# Altium PCB UCC28180_Power Board.PcbDoc
Units mil, origin at the board's own origin, x right, y up, seen from the top; angles counter-clockwise.
Board outline 5400.53 x 3184.68 mil, 4 copper layers (Top Layer, Signal Layer 1, Signal Layer 2, Bottom Layer), stack 33.434 mil thick; 75 components, 35 nets, 171 pads, 16 vias.
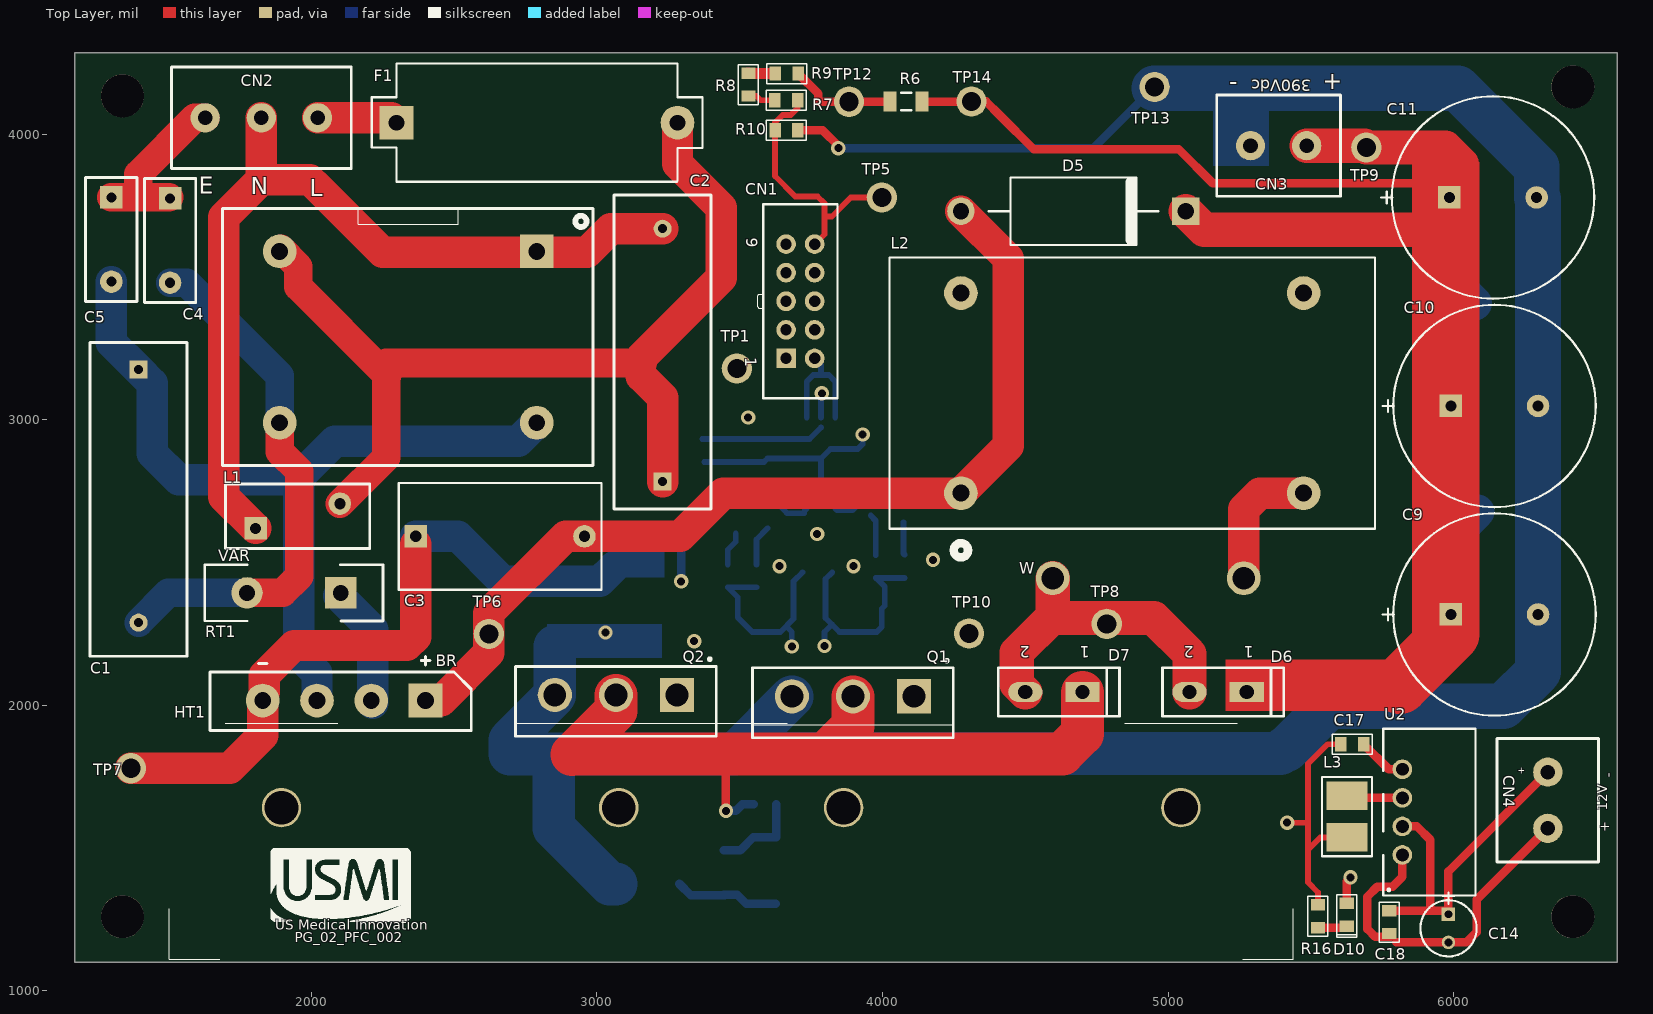
[diagram p0: Top Layer view]
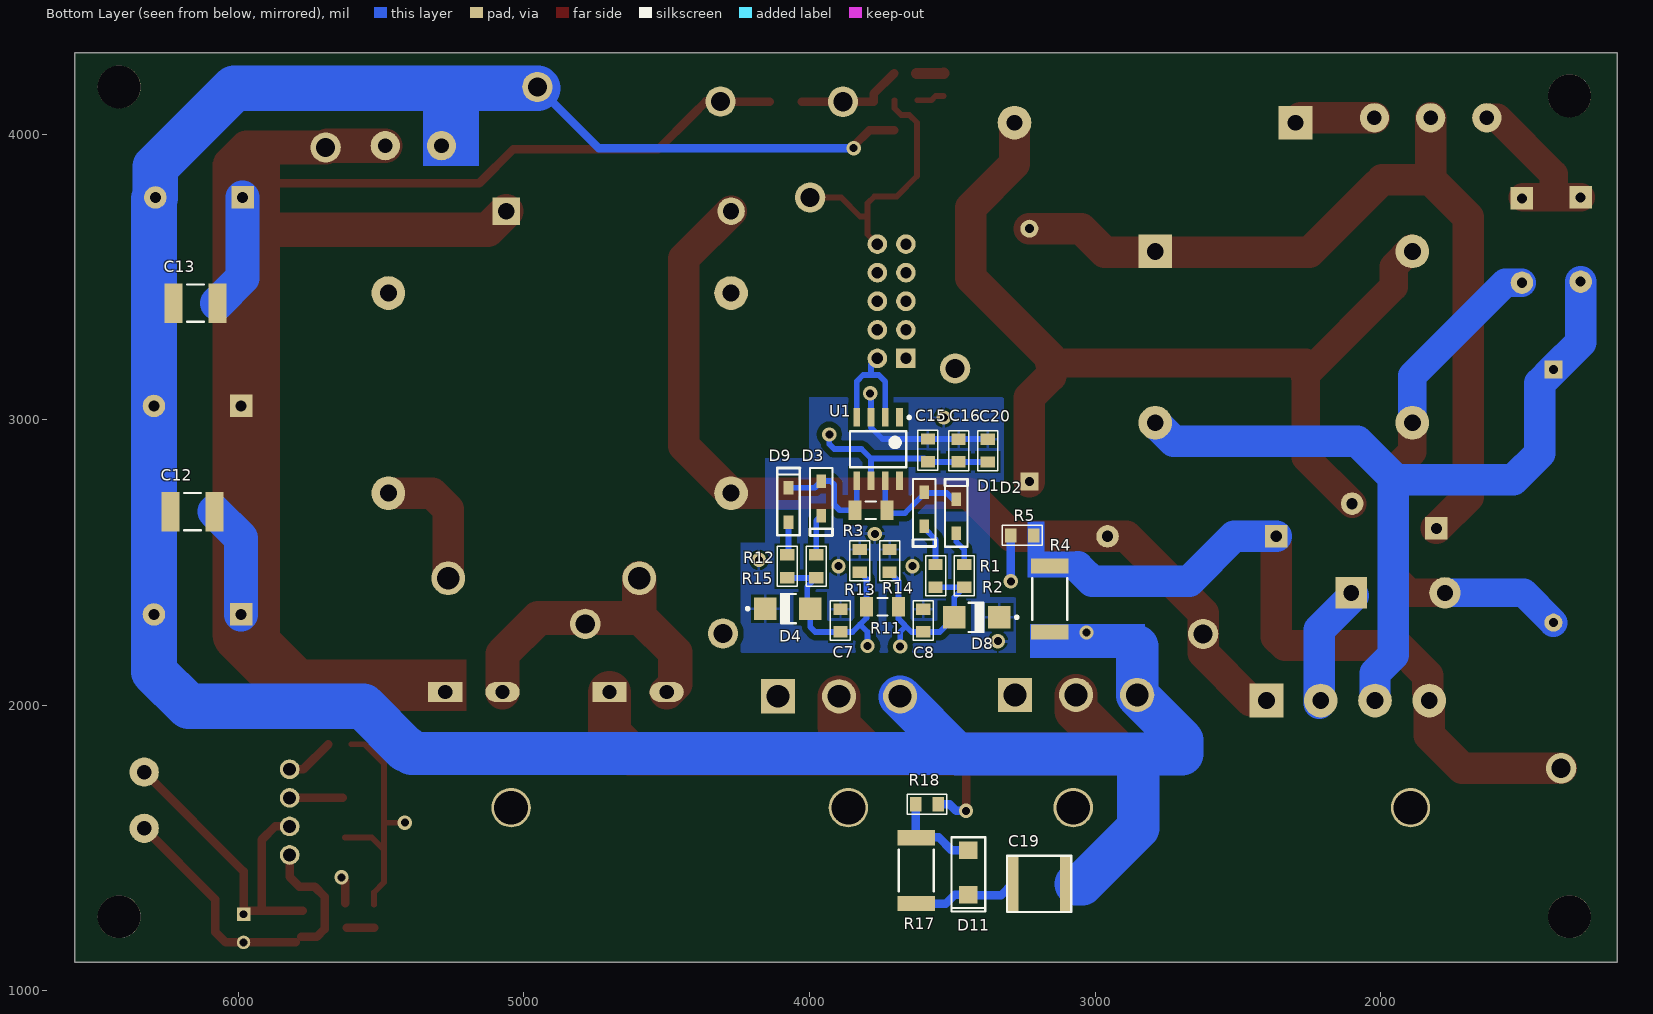
[diagram p1: Bottom Layer view, seen from below]
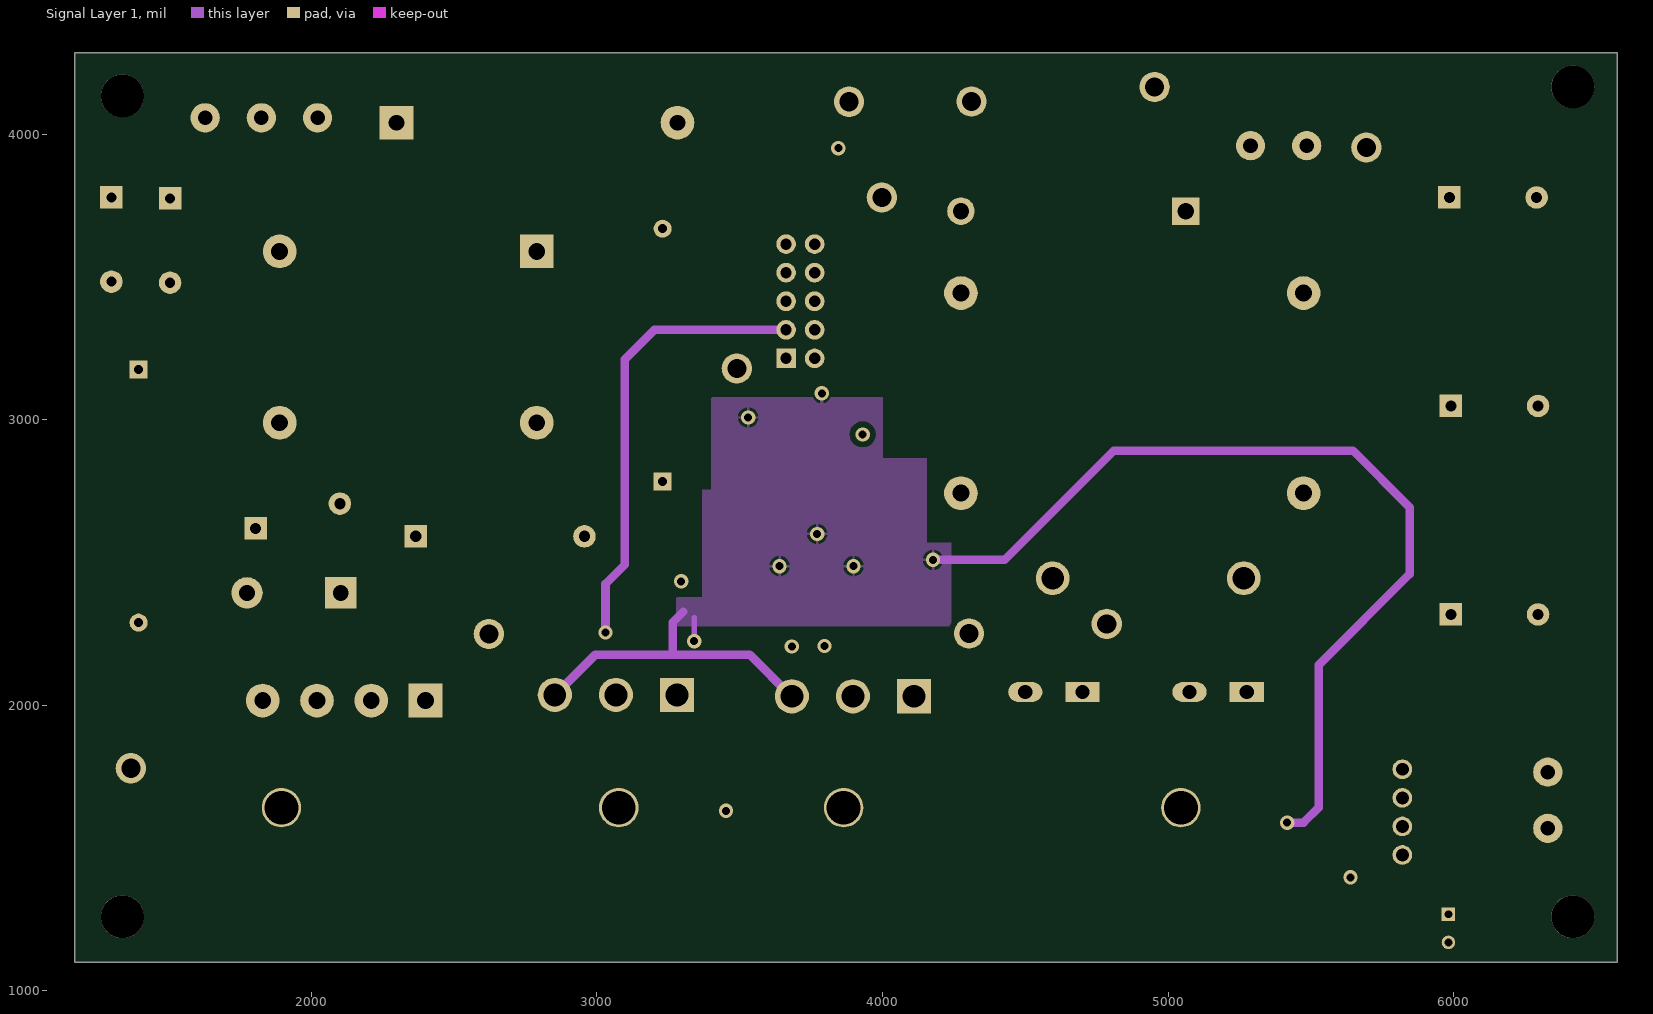
[diagram p2: Signal Layer 1]
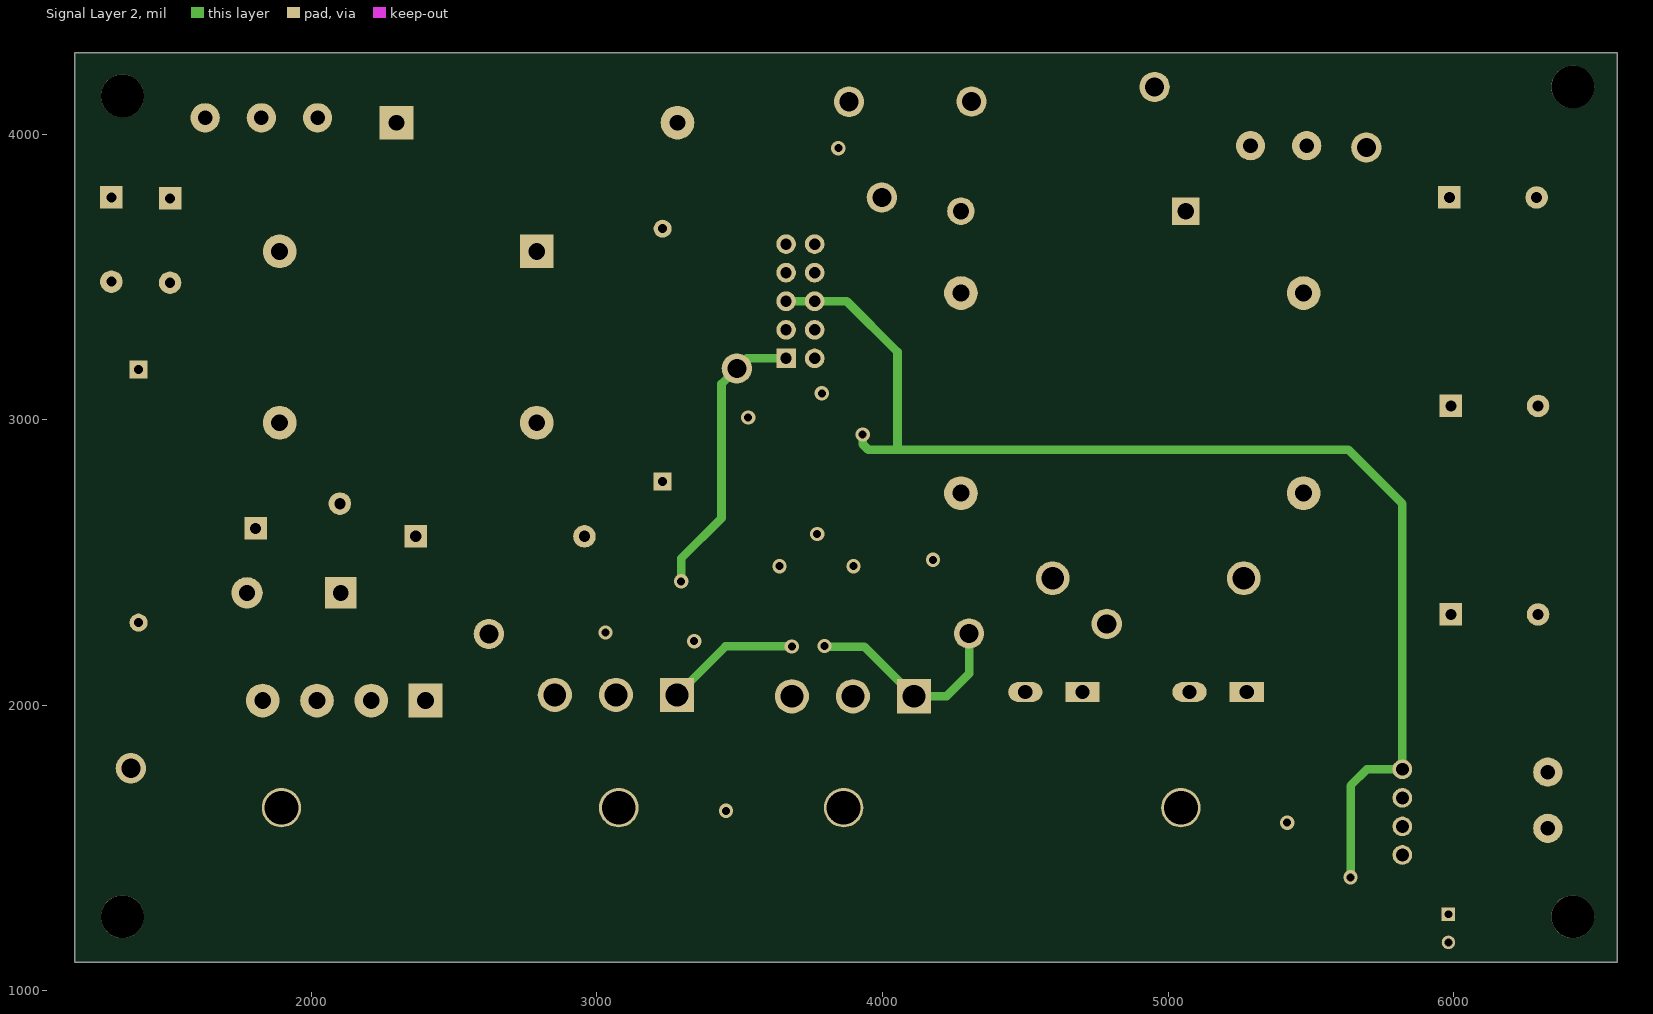
[diagram p3: Signal Layer 2]

## Layer stack, top to bottom
Top Solder: solder mask 0.4, Solder Resist, Dk 3.5
Top Layer: signal copper 2.8
Dielectric 1: core 10, FR-4, Dk 4.2
Signal Layer 1: signal copper 1.417
Dielectric 3: prepreg 5, Dk 4.2
Signal Layer 2: signal copper 1.417
Dielectric 2: core 10, Dk 4.2
Bottom Layer: signal copper 2.8
Bottom Solder: solder mask 0.4, Solder Resist, Dk 3.5

## Board outline
1171.84,1100 1171.84,4284.68 6572.37,4284.68 6572.37,1100

## Design rules (kind name [scope] priority, off if disabled: settings)
Clearance Clearance_12 [InNamedPolygon('Bottom layer-GND')] p1: gap=10 ignorepadtopadclearanceinfootprint=FALSE except(0: Arc-Hole Track-Hole SMDPad-Hole THPad-Hole Via-Hole Fill-Hole Poly-Hole Region-Hole Text-Hole; 20: Arc-Poly Track-Poly SMDPad-Poly THPad-Poly Via-Poly Fill-Poly Poly-Poly)
Clearance Clearance_11 [InNamedPolygon('Bottom layer-GND-sub')] p2: gap=10 ignorepadtopadclearanceinfootprint=FALSE except(0: Arc-Hole Track-Hole SMDPad-Hole THPad-Hole Via-Hole Fill-Hole Poly-Hole Region-Hole Text-Hole; 20: Arc-Poly Track-Poly SMDPad-Poly THPad-Poly Via-Poly Fill-Poly Poly-Poly)
Clearance Clearance_10 [InNamedPolygon('Bottom layer-GND-sub')] p3: gap=10 ignorepadtopadclearanceinfootprint=FALSE except(0: Arc-Hole Track-Hole SMDPad-Hole THPad-Hole Via-Hole Fill-Hole Poly-Hole Region-Hole Text-Hole; 20: Arc-Poly Track-Poly SMDPad-Poly THPad-Poly Via-Poly Fill-Poly Poly-Poly)
Clearance Clearance_9 [InNamedPolygon('Bottom layer-GND-main')] p4: gap=10 ignorepadtopadclearanceinfootprint=FALSE except(0: Arc-Hole Track-Hole SMDPad-Hole THPad-Hole Via-Hole Fill-Hole Poly-Hole Region-Hole Text-Hole; 55: Arc-Poly Track-Poly SMDPad-Poly THPad-Poly Via-Poly Fill-Poly Poly-Poly)
Clearance Clearance_8 [InNamedPolygon('Bottom layer-GND-main')] p5: gap=10 ignorepadtopadclearanceinfootprint=FALSE except(0: Arc-Hole Track-Hole SMDPad-Hole THPad-Hole Via-Hole Fill-Hole Poly-Hole Region-Hole Text-Hole; 55: Arc-Poly Track-Poly SMDPad-Poly THPad-Poly Via-Poly Fill-Poly Poly-Poly)
Clearance Clearance_7 [InNamedPolygon('Bottom layer-GND-main')] p6: gap=10 ignorepadtopadclearanceinfootprint=FALSE except(0: Arc-Hole Track-Hole SMDPad-Hole THPad-Hole Via-Hole Fill-Hole Poly-Hole Region-Hole Text-Hole)
Clearance Clearance_6 [InNamedPolygon('Bottom layer-GND-sub')] p7: gap=10 ignorepadtopadclearanceinfootprint=FALSE except(0: Arc-Hole Track-Hole SMDPad-Hole THPad-Hole Via-Hole Fill-Hole Poly-Hole Region-Hole Text-Hole; 20: Arc-Poly Track-Poly SMDPad-Poly THPad-Poly Via-Poly Fill-Poly Poly-Poly)
Clearance Clearance_5 [InNamedPolygon('Bottom layer-GND-main')] p8: gap=10 ignorepadtopadclearanceinfootprint=FALSE except(0: Arc-Hole Track-Hole SMDPad-Hole THPad-Hole Via-Hole Fill-Hole Poly-Hole Region-Hole Text-Hole; 55: Arc-Poly Track-Poly SMDPad-Poly THPad-Poly Via-Poly Fill-Poly Poly-Poly)
Clearance Clearance_4 [InNamedPolygon('Bottom layer-GND-main')] p9: gap=10 ignorepadtopadclearanceinfootprint=FALSE except(0: Arc-Hole Track-Hole SMDPad-Hole THPad-Hole Via-Hole Fill-Hole Poly-Hole Region-Hole Text-Hole; 20: Arc-Poly Track-Poly SMDPad-Poly THPad-Poly Via-Poly Fill-Poly Poly-Poly)
Clearance Clearance_3 [InNamedPolygon('GND_L02_P011')] p10: gap=20 ignorepadtopadclearanceinfootprint=FALSE except(0: Arc-Hole Track-Hole SMDPad-Hole THPad-Hole Via-Hole Fill-Hole Poly-Hole Region-Hole Text-Hole)
Clearance Clearance_2 [InNamedPolygon('Bottom layer-GND3')] p11: gap=20 ignorepadtopadclearanceinfootprint=FALSE except(0: Arc-Hole Track-Hole SMDPad-Hole THPad-Hole Via-Hole Fill-Hole Poly-Hole Region-Hole Text-Hole)
Clearance [InNamedPolygon('Bottom layer-GND3')] p12: gap=10 ignorepadtopadclearanceinfootprint=FALSE except(0: Arc-Hole Track-Hole SMDPad-Hole THPad-Hole Via-Hole Fill-Hole Poly-Hole Region-Hole Text-Hole)
Clearance Clearance_1 [All] p13: gap=10 ignorepadtopadclearanceinfootprint=FALSE except(0: Arc-Hole Track-Hole SMDPad-Hole THPad-Hole Via-Hole Fill-Hole Poly-Hole Region-Hole Text-Hole; 55: Arc-Poly Track-Poly SMDPad-Poly THPad-Poly Via-Poly Fill-Poly Poly-Poly)
Clearance "Clearance 2" [All] p14: gap=10 ignorepadtopadclearanceinfootprint=FALSE except(0: Arc-Hole Track-Hole SMDPad-Hole THPad-Hole Via-Hole Fill-Hole Poly-Hole Region-Hole Text-Hole; 20: Arc-Poly Track-Poly SMDPad-Poly THPad-Poly Via-Poly Fill-Poly Poly-Poly)
ComponentClearance [All] p1 off: gap=10 collisioncheckmode=3 verticalgap=10 showdistances=FALSE
PolygonConnect PolygonConnect_1 [All vs IsNamedPolygon('Bottom layer-GND-main')] p1: connectstyle=Relief reliefconductorwidth=10 reliefentries=4 polygonreliefangle="45 Angle" airgapwidth=10
PolygonConnect [All] p2: connectstyle=Relief reliefconductorwidth=10 reliefentries=4 polygonreliefangle="90 Angle" airgapwidth=10
RoutingVias [All] p1: holewidth=28 width=50 viastyle="Through Hole" minholewidth=28 minwidth=50 maxholewidth=28 maxwidth=50
SolderMaskExpansion [All] p1: expansion=4
Width [All] p1: maxlimit=300 minlimit=10 preferedwidth=10
29 further rules are at their usual default settings.

## Classes and differential pairs
component class "Top Sheet_Power System": C14 CN1 CN4 TP1 TP5
component class "U_EMI Filter": BR C1 C2 C3 C4 C5 CN2 F1 L1 RT1 TP6 TP7 VAR
component class U_2EDN7424_EiceDRIVER: C7 C8 C15 C16 C20 D1 D2 D3 D4 D8 D9 R1 R2 R3 R11 R12 R13 R14 R15 U1
component class "U_Boost Converter Circuit": C9 C10 C11 C12 C13 CN3 D5 D6 D7 HT1 L2 Q1 Q2 R4 R5 R6 R7 R8 R9 R10 TP8 TP9 TP10 TP12 TP13 TP14 W
component class "U_12V DC-DC ISOLATOR": C17 C18 L3 U2
component class "U_Power LED Circuit": D10 R16
component class "U_R2CD Snubber circuit": C19 D11 R17 R18

## Components (designator, comment, footprint, x,y, rotation, side; value= is the part's Value field where it differs from the comment)
BR "GBU8J-BP" GBU8J 2400.05,2016.5 r180 top (schematic designator BR1)
C1 "ECQ-U2A474ML" ECQ-U2A474ML 1394.99,3175.23 r270 top
C2 "ECQ-U2A474ML" ECQ-U2A474ML 3229.87,2783.02 r90 top
C3 "ECQ-U2A334ML" CAPFILM0.33U 2365.76,2591.62 r0 top
C4 "CS11-E2GA222MYNS" CS11-E2GA222MYNS 1505.25,3775.06 r270 top
C5 "CS11-E2GA222MYNS" CS11-E2GA222MYNS 1299.75,3778.71 r270 top
C7 "C0805C102J5GACTU" CAP0805_NEW 3891.56,2296.98 r270 bottom (schematic designator C1)
C8 "C0805C102J5GACTU" CAP0805_NEW 3601.86,2296.98 r270 bottom (schematic designator C2)
C9 "450QXW120MEFC18X31.5" 450QXW120MEFC18X31.5 5990.28,2318.28 r0 top (schematic designator C6)
C10 "450QXW120MEFC18X31.5" 450QXW120MEFC18X31.5 5990.28,3048.28 r0 top locked (schematic designator C7)
C11 "450QXW120MEFC18X31.5" 450QXW120MEFC18X31.5 5985.28,3778.28 r0 top (schematic designator C8)
C12 "GRM43DR72J104KW01L" CAP1812 6160.28,2678.28 r180 bottom (schematic designator C9)
C13 "GRM43DR72J104KW01L" CAP1812 6150.28,3408.28 r180 bottom (schematic designator C11)
C14 "ECA-1VM470" CAPALUM47U 5981.64,1268.26 r270 top (schematic designator C10)
C15 "GRM21BR61H475KE51L" CAP0805_NEW 3585.31,2892.55 r270 bottom (schematic designator C4)
C16 "C0805C104J5RACAUTO" CAP0805_NEW 3477.87,2892.13 r270 bottom (schematic designator C5)
C17 "CC0805JKX7R9BB105" CAP0805_NEW 5644.55,1863.75 r180 top (schematic designator C1)
C18 "CC0805JKX7R9BB105" CAP0805_NEW 5774.1,1241.05 r270 top (schematic designator C2)
C19 "C2220_Generic" CAP2220 3195.88,1374.88 r0 bottom (schematic designator C1)
C20 "CC0805JKX7R9BB105" CAP0805_NEW 3375.47,2892.1 r270 bottom (schematic designator C3)
CN1 "MSPV10-ND" MSV10-ND 3712.39,3414.88 r270 top
CN2 "1935789" CONN_1935789 1628.07,4057.35 r0 top
CN3 "1935776" CONN_1935776 5485.44,3959.47 r180 top
CN4 "1935776" CONN_1935776 6329.39,1569.33 r90 top
D1 "DB2W40300L" Mini2-F3-B 3598.28,2686.55 r270 bottom
D2 "DB2W40300L" Mini2-F3-B 3486.46,2661.79 r90 bottom
D3 "DB2W40300L" Mini2-F3-B 3958.54,2724.4 r270 bottom
D4 "1SMA12CAT3G" ONSC-SMA-2-403D-02_F_V 4076.39,2338.46 r180 bottom
D5 "1N5406RLG" 1N5406-DO201AD 4274.53,3730.25 r0 top (schematic designator D1)
D6 "C3D04060A" C3D04060A 5275.05,2046.5 r180 top (schematic designator D2)
D7 "C3D04060A" C3D04060A 4700.05,2046.5 r180 top locked (schematic designator D3)
D8 "1SMA12CAT3G" ONSC-SMA-2-403D-02_F_V 3413.97,2308.2 r0 bottom (schematic designator D5)
D9 "DB2W40300L" Mini2-F3-B 4073.54,2701.52 r90 bottom (schematic designator D6)
D10 "LED Diode_Green" D0805 5625.69,1266.64 r90 top (schematic designator D1)
D11 "UA1MTR" DO-214AC 3443.99,1414.71 r270 bottom (schematic designator D1)
F1 "FUSE" 0031.8211 2297.74,4040.27 r0 top
HT1 "HT_78245" HT-78245 3470.05,1641.5 r0 top
L1 "8113-RC" 8113-RC 2339.09,3289.54 r180 top
L2 "51-1785LF" G-51-185LF 4274.53,2742.85 r0 top
L3 "84473C" INDC5435X06N 5626.72,1610.52 r270 top (schematic designator L1)
Q1 "C3M0065090D" TO-247-3 4110.05,2031.5 r180 top
Q2 "C3M0065090D" TO-247-3 3280.05,2036.5 r180 top
R1 "R0805_Generic" RES0805_New 3558.67,2453 r90 bottom
R2 "R0805_Generic" RES0805_New 3458.47,2453 r90 bottom
R3 "CRCW12060000Z0EA" RES1206 3784.8,2683.31 r0 bottom (schematic designator R7)
R4 "CRCW2512R0.027" RES2512 3158.59,2372.19 r90 bottom (schematic designator R1)
R5 "RC0805FR-07221RL" RES0805_New 3254.77,2594.76 r0 bottom (schematic designator R2)
R6 "CRCW120649R9FKEA" RES1206 4082.77,4114.32 r180 top (schematic designator R3)
R7 "CRCW0805340KFKEA" RES0805_New 3662.54,4118.64 r0 top (schematic designator R4)
R8 "CRCW0805332KFKEA" RES0805_New 3530.35,4173.45 r270 top (schematic designator R5)
R9 "CRCW0805332KFKEA" RES0805_New 3664.48,4212.3 r180 top (schematic designator R6)
R10 "RC0805FR-0713KL" RES0805_New 3663.68,4013.73 r0 top (schematic designator R7)
R11 "CRCW12060000Z0EA" RES1206 3744.41,2345 r0 bottom (schematic designator R8)
R12 "R0805_Generic" RES0805_New 3976.51,2487 r90 bottom (schematic designator R3)
R13 "TNPW080510K0FEEA" RES0805_New 3823.85,2505.5 r90 bottom (schematic designator R4)
R14 "TNPW080510K0FEEA" RES0805_New 3719.43,2505.5 r90 bottom (schematic designator R5)
R15 "R0805_Generic" RES0805_New 4078.02,2487 r90 bottom (schematic designator R6)
R16 "ERJ-PB6B5100V" RES0805_New 5524.61,1261.53 r90 top (schematic designator R1)
R17 "R2512_Generic" RES2512 3626.15,1421.06 r270 bottom (schematic designator R1)
R18 "RMCF0805JT47R0" RES0805_New 3588.44,1653.47 r0 bottom (schematic designator R2)
RT1 "CL-40" CL-40 2102.64,2393.7 r180 top
TP1 "5006" "Test Point" 3489.91,3179.39 r0 top
TP5 "5006" "Test Point" 3997.64,3778.28 r0 top
TP6 "5006" "Test Point" 2621.56,2249.96 r0 top
TP7 "5006" "Test Point" 1367.99,1779.56 r0 top
TP8 "5006" "Test Point" 4785,2285 r0 top
TP9 "5006" "Test Point" 5694.18,3953.25 r0 top
TP10 "5006" "Test Point" 4302.94,2251.57 r90 top
TP12 "5006" "Test Point" 3882.77,4113.56 r90 top
TP13 "5006" "Test Point" 4952.62,4165.23 r90 top
TP14 "5006" "Test Point" 4311.39,4114.32 r90 top
U1 "2EDN7424" SOIC127P600X173-8N 3759.53,2896.79 r270 bottom (schematic designator U)
U2 "MEE3S1212SC" MEE3S1212SC 5820.04,1626.01 r90 top (schematic designator U1)
VAR "S10K275E2" S10K275E2 1804.59,2619.56 r0 top (schematic designator VAR1)
W "Wire" "Current Sense Wire" 5265,2445 r180 top (schematic designator W1)

## Footprints (in the part's own frame and the unit in brackets; to place one, negate y for a bottom-side part, rotate by r counter-clockwise, add the part's x,y. Pads: shape width x height; smd on the part's side, far side on the other; paste and mask are expansions set on the pad)
1N5406-DO201AD [mm] "Diode"
  rect 2.45x2.45 hole 1.45: 1(20,0)
  round 2.45 hole 1.45: 2(0,0)
  silkscreen extent 2.45,-3 17.55,3
0031.8211 [mm] "Fuse Holder"
  rect 3x3 hole 1.4: 1(0,0)
  round 3 hole 1.4: 2(25,0)
  silkscreen extent -2.2,-5.25 27.23,5.25, body extent 0.45,-4.8 24.55,4.8, height 11.51
450QXW120MEFC18X31.5 [mm] "Radial Electrolytic Capacitor"
  rect 2x2 hole 1: 1(0,0)
  round 2 hole 1: 2(7.75,0)
  silkscreen extent -6.1,-9 12.87,9, body extent -5.24,-9.25 12.96,8.94, height 39.75
8113-RC [mm] "EMI Choke"
  rect 3x3 hole 1.5: 1(-11.43,-7.62)
  round 3 hole 1.5: 2(-11.43,7.62) 3(11.43,7.62) 4(11.43,-7.62)
  silkscreen extent -16.43,-11.43 16.51,11.43
C3D04060A [mil] "Schotky diode"
  rect 120x69.69 hole 50: 1(0,0)
  oval 120x69.69 hole 50: 2(200,0)
  silkscreen extent -130,-85 295,85
CAP0805_NEW [mil] "SMD_Capacitor"
  rect 40x50 smd: 1(-40,0) 2(40,0)
  silkscreen extent -70,-35 70,35, body extent -41,-25 40,25, height 26
CAP1812 [mm] "Capacitor"
  rect 1.6x3.5 smd: 1(-1.95,0) 2(1.95,0)
  silkscreen extent -0.75,-1.65 0.75,1.65, body extent -2.4,-1.75 2.4,1.75, height 0.7
CAP2220 [mm] "SMD_Capacitor"
  rect 1x5 smd: 1(-2.35,0) 2(2.35,0)
  silkscreen extent -2.85,-2.5 2.85,2.5
CAPALUM47U [mm] "Aluminum Capacitor"
  rect 1.2x1.2 hole 0.7: 1(0,0)
  round 1.2 hole 0.7: 2(2.5,0)
  silkscreen extent -1.93,-2.5 3.75,2.5, body extent -1.38,-2.54 3.82,2.66, height 11.5
CAPFILM0.33U [mm] "Film Capacitor"
  rect 2x2 hole 1: 1(0,0)
  round 2 hole 1: 2(15,0)
  silkscreen extent -1.52,-4.75 16.51,4.75
CL-40 [mm] "NTC Thermistor"
  rect 2.8x2.8 hole 1.4: 1(0,0)
  round 2.8 hole 1.4: 2(8.33,0)
  silkscreen extent -3.75,-2.5 12.08,2.5
CONN_1935776 [mm] "2 Pin Connector"
  round 2.6 hole 1.3: 1(0,0) 2(5,0)
  silkscreen extent -3,-4.5 8,4.5, body extent -3.2,-5.2 7.4,4.6, height 13.81
CONN_1935789 [mm] "3 Pin Connector"
  round 2.6 hole 1.3: 1(0,0) 2(5,0) 3(10,0)
  silkscreen extent -3,-4.5 13,4.5
CS11-E2GA222MYNS [mm] "Disc Cap"
  rect 2x2 hole 0.9: 1(0,0)
  round 2 hole 0.9: 2(7.5,0)
  silkscreen extent -1.78,-2.29 9.27,2.29
"Current Sense Wire" [mm]
  round 3 hole 2: 1(0,0) 2(17,0)
D0805 [mil] "SMD_LED Diode"
  rect 40x50 smd: 1(-40,0) 2(40,0)
  silkscreen extent -79,-35 70,35, body extent -41,-25 40,25, height 27
DO-214AC [mm] "Diode"
  rect 1.55x1.67 smd: 1(1.965,0) 2(-1.965,0)
  silkscreen extent -3.13,-1.5 3.47,1.5
ECQ-U2A474ML [mm] "Film Capacitor"
  rect 1.6x1.6 hole 0.8: 1(0,0)
  round 1.6 hole 0.8: 2(22.5,0)
  silkscreen extent -2.41,-4.32 25.49,4.32
G-51-185LF [mm] "Gowanda Inductor"
  round 3 hole 1.5: 1(0,0) 2(30.48,0) 3(30.48,17.8) 4(0,17.8)
  silkscreen extent -6.35,-5.71 36.83,20.95
GBU8J [mm] "Bridge rectifier"
  rect 3x3 hole 1.5: 1(0,0)
  round 3 hole 1.5: 2(4.83,0) 3(9.66,0) 4(14.49,0)
  silkscreen extent -4.06,-3.94 19.18,2.67
HT-78245 [mm] "Aavid Thermalloy Heatsink"
  round 3.5 hole 3: 1(-40,0) 2(-10,0) 3(10,0) 3(40,0)
  silkscreen extent -50,-13.5 50,7.5
INDC5435X06N [mm] "Chip Inductor, 2-Leads, Body 5.35x3.50mm, IPC Medium Density"
  rect 2.54x3.64 smd: 1(-1.855,0) 2(1.855,0)
  silkscreen extent -3.52,-2.22 3.52,2.22, body extent -2.75,-1.75 2.75,1.75, height 0.6
MEE3S1212SC [mm] "12V DC/DC ISOLATOR"
  round 1.75 hole 1.15: 1(-3.81,0) 2(-1.27,0) 3(1.27,0) 4(3.81,0)
  silkscreen extent -7.41,-6.5 7.41,1.7
Mini2-F3-B [mm] "Schottky Diode"
  rect 1.2x0.85 smd: 1(1.525,0) 3(-1.525,0)
  silkscreen extent -2.7,-1.02 3.3,1
MSV10-ND [mm] "CONN SOCKET PCB VERT 10POS .1"
  rect 1.75x1.75 hole 1: 1(5.08,-1.27)
  round 1.75 hole 1: 2(5.08,1.27) 3(2.54,-1.27) 4(2.54,1.27) 5(0,-1.27) 6(0,1.27) 7(-2.54,-1.27) 8(-2.54,1.27) 9(-5.08,-1.27) 10(-5.08,1.27)
  silkscreen extent -8.64,-3.81 8.64,3.3
ONSC-SMA-2-403D-02_F_V [mm] "Molded, 2-Leads, Body 4.32x2.6mm"
  rect 2x2 smd: 1(-2,0) 2(2,0)
  silkscreen extent -3.68,-1.3 0.74,1.3, body extent -2.16,-1.3 2.16,1.3, height 2.2
RES0805_New [mil] "SMD_Resistor"
  rect 40x50 smd: 1(-40,0) 2(40,0)
  silkscreen extent -70,-35 70,35, body extent -41,-25 40,25, height 27
RES1206 [mm]
  rect 1.15x1.75 smd: 1(-1.425,0) 2(1.425,0)
  silkscreen extent -0.45,-0.77 0.45,0.77, body extent -1.65,-0.87 1.65,0.87, height 0.5
RES2512 [mm]
  rect 1.35x3.3 smd: 1(-2.925,0) 2(2.925,0)
  silkscreen extent -1.85,-1.55 1.85,1.55, body extent -3.25,-1.65 3.25,1.65, height 0.7
S10K275E2 [mm] "Varistor"
  rect 2x2 hole 1: 1(0,0)
  round 2 hole 1: 2(7.5,2.2)
  silkscreen extent -2.67,-1.78 10.16,3.94
SOIC127P600X173-8N [mm] "SOIC, 8-Leads, Body 4.89x3.90mm, Pitch 1.27mm, IPC Medium Density"
  rect 1.65x0.6 smd: 1(-2.825,1.905) 2(-2.825,0.635) 3(-2.825,-0.635) 4(-2.825,-1.905) 5(2.825,-1.905) 6(2.825,-0.635) 7(2.825,0.635) 8(2.825,1.905)
  silkscreen extent -2.95,-2.5 1.6,2.88, body extent -3.01,-2.5 3.01,2.5, height 1.73
"Test Point" [mm] "Test Point"
  round 2.7 hole 1.7: 1(0,0)
  body extent -1.63,-1.5 1.55,1.68, height 5.49
TO-247-3 [mm] "Transistor"
  rect 3.04x3.04 hole 2.03: 1(0,0)
  round 3.04 hole 2.03: 2(5.43,0) 3(10.86,0)
  silkscreen extent -3.5,-3.3 14.36,3.68

## Part data
BR: "RECT BRIDGE GPP 8A 600V GBU"
C1 C2: "CAP FILM 0.47UF 20% 275VAC RAD"
C3: "CAP FILM 0.33UF 20% 275VAC RAD"
C4 C5: "CAP CER 2200PF 250VAC RADIAL"
C7 C8: "CAP CER 1000PF 50V C0G/NP0 0805"
C12 C13: "CAP CER 0.1UF 630V X7R 1812"
C14: "CAP ALUM 47UF 20% 35V RADIAL"
C15: "CAP CER 4.7UF 50V X5R 0805"
C16: "CAP CER 0.1UF 50V X7R 0805"
C17 C18 C20: "CAP CER 1UF 50V X7R 0805"
CN1: "CONN SOCKET PCB VERT 10POS .1\""
CN2: "CONN TERM BLOCK 3POS 5.0MM"
CN3 CN4: "CONN TERM BLOCK 2POS 5.0MM"
D4 D8: "400 W Peak Power Zener Transient Voltage Suppressor, 2-Pin SMA, Pb-Free, Tape and Reel"
D5: "DIODE GEN PURP 600V 3A DO201AD"
D6 D7: "DIODE SCHOTTKY 600V 4A TO220-2"
D11: "DIODE SCHOTTKY 1KV 1A SMA"
L1: "CMC 5MH 8.9A 2LN TH"
L3: "FIXED IND 47UH 420MA 1.1 OHM"
Q1 Q2: "MOSFET N-CH 900V 36A TO247-3"
R3 R11: "RES SMD 0.0 OHM JUMPER 1/4W 1206"
R5: "RES SMD 221 OHM 1% 1/8W 0805"
R6: "RES SMD 49.9 OHM 1% 1/4W 1206"
R7: "RES SMD 340K OHM 1% 1/8W 0805"
R8 R9: "RES SMD 332K OHM 1% 1/8W 0805"
R10: "RES SMD 13K OHM 1% 1/8W 0805"
R13 R14: "RES 10K OHM 1% 1/5W 0805"
R16: "RES SMD 510 OHM 0.1% 1/4W 0805"
R18: "RES SMD 47 OHM 5% 1/8W 0805"
RT1: "ICL 5 OHM 25% 6A 19.56MM"
TP1 TP5 TP6 TP7 TP8 TP9 TP10 TP12 TP13 TP14: "TEST POINT PC COMPACT .063\"D BLK"
U2: "DC/DC CONVERTER 12V 3W ISOLATED"
VAR: "VARISTOR 430V 3.5KA DISC 10MM"

## Free pads (board coordinates)
  round 150 hole 150: 1(1338.58,1259.84) 2(1338.58,4133.86) 3(6417.32,1259.84) 4(6417.32,4165.23)

## Via types
v1: diameter 50, hole 28, Top Layer to Bottom Layer, 14 vias
v2: diameter 50, hole 28, Top Layer to Bottom Layer, tented both sides, 2 vias

## Nets (pads, with @x,y where several pads share a name; then routed paths per layer and width w, separated by ;. In a path a pad name is that pad's centre, name@x,y a point inside that pad or via, vN(x,y) a via of type N, cw(c..) or ccw(c..) an arc to the next point about the centre after c; other vN are vias at no path point)
"+12V SUPPLY": C14.1 C18.1 CN4.2 U2.2 | length 1202.3
  Top Layer w30: C18.1 5918.21,1281.05 ; U2.2 5871.19,1576.01 5918.21,1528.99 5918.21,1281.05 ; C14.1@5968.85,1281.05 5918.21,1281.05 ; C14.1 5981.64,1418.43 CN4.2
+12V_ISO: C15.2 C16.2 C17.1 C20.2 CN1.5 CN1.6 D10.2 U1.6 U2.4 | length 5228.6
  Top Layer w30: D10.2 5625.69,1384.52 v1(5639.03,1397.86) ; C17.1 5772.29,1776.01 U2.4
  Signal Layer 2 w30: CN1.5 CN1.6 3874.68,3414.88 4052.47,3237.08 4052.47,2900.06 ; v1(3930.51,2948.43) 3930.51,2914.36 3950.1,2894.78 5631.47,2894.78 5820.04,2706.21 U2.4 5696.14,1776.01 5639.03,1718.9 v1(5639.03,1397.86)
  Bottom Layer w20: C20.2 3584.86,2852.1 C15.2 3597.15,2864.39 3784.53,2864.39 ; U1.6 3784.53,2864.39 ; v1(3930.51,2948.43) 3930.51,2914.6 3913.32,2897.4 3817.54,2897.4 3784.53,2864.39
"-12V SUPPLY": C14.2 C18.2 CN4.1 U2.1 | length 1198.2
  Top Layer w30: C18.2@5779.32,1188.92 5725.21,1188.92 5697.71,1216.42 5697.71,1330.42 5732.33,1365.04 5786.05,1365.04 5820.04,1399.04 U2.1 ; 5798.4,1169.84 C14.2 6044.27,1169.84 6080.58,1206.15 6080.58,1320.52 CN4.1
-12V_ISO: C7.1 C8.1 C9.2 C10.2 C11.2 C12.1 C13.1 C15.1 C16.1 C17.2 C19.1 C20.1 CN1.3 CN3.2 D4.1 D8.1 L3.2 Q1.3 Q2.3 R4.1 R10.2 R13.2 R14.2 R16.2 TP13.1 U1.3 | length 16997.1
  Top Layer w20: v1(5416.95,1589.23) 5489.49,1589.23 ; R16.2 5524.61,1345.01 5489.49,1380.14 5489.49,1494.24 ; C17.2 5557.84,1863.75 5489.49,1795.4 5489.49,1589.23 ; L3.2 5532.74,1537.49 5489.49,1494.24 ; 5489.49,1494.24 5489.49,1589.23
  Top Layer w30: R10.2 3789.71,4013.73 3845.35,3958.09 v2(3845.35,3951.01)
  Signal Layer 1 w20: v1(3340.43,2224.78) 3340.43,2306.82
  Signal Layer 1 w30: Q2.3@2852.44,2035 2994.42,2176.98 3264.94,2176.98 ; v2(3030,2255) 3030,2425 3097.99,2492.99 3097.99,3211.68 3201.19,3314.88 CN1.3 ; 3301.62,2327.1 3264.94,2290.42 3264.94,2176.98 ; Q1.3@3682.44,2030 3535.46,2176.98 3264.94,2176.98 ; v1(4177,2509.3) 4427.54,2509.3 4810.09,2891.84 5647.25,2891.84 5845.69,2693.4 5845.69,2459.82 5527.36,2141.49 5527.36,1642.06 5474.53,1589.23 v1(5416.95,1589.23)
  Bottom Layer w20: C20.1@3369.25,2932.74 3744.41,2932.74 3784.23,2972.56 ; v1@3784.23,3093.56 3784.23,3008.31 U1.3
  Bottom Layer w30: v2(3845.35,3951.01) 4738.4,3951.01 TP13.1
  Bottom Layer w150: 2852.44,2205.71 2852.44,2035 2695,1877.56 2695,1830 2848.81,1830 ; 3066.27,1374.88 3044.91,1374.88 2848.81,1570.98 2848.81,1830 ; 3482.44,1830 2848.81,1830 ; Q1.3@3682.44,2030 3483.61,1831.16 5393.81,1831.16 5409.2,1846.55
  Bottom Layer w160: TP13.1@4952.62,4161.13 6013.93,4161.13 6290.4,3884.66 C11.2 6295.4,3773.28 C10.2 6295.4,2118.13 6173.73,1996.46 5563.16,1996.46 5413.25,1846.55 5409.2,1846.55
  other v1: 3639.6,2487.35 3898.42,2487.35 3771.24,2600.14 3529.44,3008.01 3787.26,3092.61
EARTH: C4.1 C5.1 CN2.1 | length 598.2
  Top Layer w100: C5.1 1394.56,3778.71 ; C4.1@1501.61,3778.71 1394.56,3778.71 ; CN2.1 1592.29,4057.35 1394.56,3859.62 1394.56,3778.71
LINE: CN2.3 F1.1 | length 283.1
  Top Layer w110: CN2.3 2280.66,4057.35 F1.1
NetBR_1: BR.1 C3.2 D5.2 L2.1 TP6.1 | length 3386.7
  Top Layer w110: BR.1@2400,2015 BR.1@2400,2020 ; BR.1 2454.26,2016.5 2621.56,2183.81 TP6.1 2621.56,2323.11 2890.65,2592.2 3291.12,2592.2 3441.77,2742.85 L2.1 4440.33,2908.65 4440.33,3564.45 D5.2
NetBR_2: BR.2 RT1.1 | length 426.3
  Bottom Layer w110: RT1.1@2096.07,2383.93 2214.84,2265.16 BR.2@2214.84,2006.79
NetBR_3: BR.3 C1.1 C5.2 L1.2 | length 2936.7
  Bottom Layer w110: C5.2 1299.75,3270.47 C1.1 1442.24,3127.98 1442.24,2882.76 1535.47,2789.53 1955.77,2789.53 1955.77,2176.04 2019.73,2112.08 BR.3 ; 1946.63,2789.53 2082.1,2925 2724.55,2925 L1.2
NetBR_4: BR.4 C3.1 R4.2 R5.1 TP7.1 | length 2382.4
  Top Layer w110: TP7.1 1713.83,1779.56 1829.58,1895.31 BR.4 ; BR.4@1834.53,2045 1834.53,2104.53 1939.47,2209.47 2334.47,2209.47 2365,2240 C3.1@2365,2565
  Bottom Layer w110: C3.1 2513.38,2591.62 2670.8,2434.2 3009.91,2434.2 3060.28,2484.56
NetC1_2: C1.2 C4.2 L1.3 RT1.2 | length 1878.5
  Top Layer w100: RT1.2 1899.09,2393.7 1957.09,2451.7 1957.09,2820.42 1889.09,2888.42 L1.3
  Bottom Layer w100: C1.2 1499.28,2393.7 RT1.2 ; C4.2 1563.2,3479.79 1889.09,3153.9 L1.3
NetC2_1: C2.1 F1.2 L1.4 VAR.2 | length 3472.3
  Top Layer w100: L1.4@1892.44,3598.6 1954.84,3536.2 1954.84,3465.16 2265,3155 ; VAR.2 2262.89,2869.21 2262.89,3198.72 3154.95,3198.72
  Top Layer w110: 3154.95,3152.89 3229.87,3077.97 C2.1 ; 3154.95,3198.72 3154.95,3216.77 3435.56,3497.38 3435.56,3742.78 3281.99,3896.35 F1.2
NetC7_2: C7.2 D4.2 Q1.1 R11.2 R12.1 R13.1 R15.1 TP10.1 | length 1519.1
  Signal Layer 2 w30: v1@3800.51,2205.71 3935.84,2205.71 Q1.1 4223.99,2031.5 4302.94,2110.45 TP10.1
  Bottom Layer w20: v1(3796.61,2207.43) 3796.61,2256.56 3823.18,2283.12 ; R13.1 3800.51,2442.16 R11.2 3800.51,2305.79 3823.18,2283.12 ; R12.1@3976.51,2445.82 R12.1@3977.69,2445.82 ; R12.1 R12.1@3977.69,2445.82 ; R15.1@4076.84,2445.82 R12.1@3977.69,2445.82 ; 3823.18,2283.12 3849.31,2256.98 C7.2 3979.48,2256.98 3997.64,2275.14 D4.2 4008.27,2349.09 4008.27,2415.24 R12.1@3977.69,2445.82
NetC8_2: C8.2 D8.2 Q2.1 R1.1 R2.1 R11.1 R14.1 | length 1183.1
  Signal Layer 2 w30: Q2.1 3449.75,2206.21 v1@3686.7,2206.21
  Bottom Layer w20: R1.1 R2.1 3492.71,2378.76 D8.2 3544.06,2256.85 3642.25,2256.85 3688.3,2302.9 R11.1 3688.3,2434.38 R14.1 ; 3665.28,2274.09 3682.49,2256.88 v1(3682.49,2205.71)
NetC19_2: C19.2 D11.1 R17.2 | length 370.7
  Bottom Layer w30: C19.2 3329.02,1334.26 D11.1@3447.08,1334.26 ; D11.1 3490.67,1337.35 3522.12,1305.9 R17.2
NetCN1_1: CN1.1 R5.2 TP1.1 | length 1174.2
  Signal Layer 2 w30: v1(3294.77,2434.38) 3294.77,2514.07 3436.06,2655.35 3436.06,3125.54 TP1.1 3525.4,3214.88 CN1.1
  Bottom Layer w30: v1(3294.77,2434.38) 3294.77,2592.83 3295.74,2593.79 R5.2
NetCN1_2: CN1.2 U1.2 U1.4 | length 406.7
  Bottom Layer w20: U1.2 3734.53,3133.85 3757.55,3156.87 3784.8,3156.87 ; CN1.2@3784.8,3192.47 3784.8,3156.87 ; U1.4 3834.53,3134.39 3812.04,3156.87 3784.8,3156.87
NetCN1_10: CN1.10 R7.2 R10.1 TP5.1 | length 913.7
  Top Layer w20: 3623.01,3853.1 3694.23,3781.89 3772.82,3781.89 3796.61,3758.1 3796.61,3711.9 ; 3623.68,3853.1 R10.1 3623.68,4040.24 3650.52,4067.08 3678.87,4067.08 3702.54,4090.75 R7.2 ; CN1.10 3796.61,3649.11 3796.61,3711.9 ; TP5.1 3889.03,3778.28 3822.65,3711.9 3796.61,3711.9
NetD1_1: D1.1 R1.2 | length 143.8
  Bottom Layer w20: R1.2 3558.67,2580.81 D1.1@3598.28,2620.43
NetD1_3: D1.3 D2.1 R3.1 U1.7 | length 375
  Bottom Layer w20: D2.1@3494.55,2718.84 3519.26,2743.55 3595.24,2743.55 3665.79,2672.99 R3.1@3725.44,2672.99 ; R3.1 3734.53,2689.14 U1.7
NetD2_3: D2.3 R2.2 | length 120.3
  Bottom Layer w20: R2.2 3458.47,2545.14 3486.46,2573.14 D2.3
NetD3_1: D3.1 R12.2 | length 146
  Bottom Layer w20: D3.1 3976.51,2646.39 R12.2@3976.51,2525.82
NetD3_3: D3.3 D9.1 R3.2 U1.5 | length 431
  Bottom Layer w20: U1.5 3834.53,2689.68 R3.2 3894.18,2683.31 3913.32,2702.45 3913.32,2772.68 3926.21,2785.57 3957.41,2785.57 D3.3 3981.42,2761.56 D9.1
NetD6_2: D6.2 D7.2 TP8.1 W.2 | length 1136
  Top Layer w120: D7.2@4500,2045 4470,2075 4470,2185 4595.71,2310.71 ; W.2 4595.71,2305.42 4949.58,2305.42 5075,2180 D6.2@5075,2045
NetD7_1: D7.1 Q1.2 Q2.2 R18.1 | length 2761.7
  Top Layer w30: v1(3451.73,1630.8) 3451.73,1826.64 3455.09,1830
  Top Layer w150: 2912.5,1827.5 3066.22,1981.22 Q2.2@3066.22,2035 ; 2930,1830 3455.09,1830 3800,1830 ; Q1.2@3896.22,2030 3896.22,1926.22 3800,1830 ; D7.1@4700,2045 4700,1900 4630,1830 3800,1830
  Bottom Layer w30: v1(3451.73,1630.8) 3486.8,1630.8 3509.47,1653.47 R18.1
NetD9_3: D9.3 R15.2 | length 116.3
  Bottom Layer w20: D9.3 4073.54,2531.49 R15.2
NetD10_1: D10.1 R16.1 | length 96
  Top Layer w30: R16.1 D10.1@5620.57,1221.53
NetD11_2: D11.2 R17.1 R18.2 | length 318.7
  Bottom Layer w30: D11.2 3501.48,1492.07 3547.92,1538.51 3628.44,1538.51 R18.2
NetL2_2: L2.2 W.1 | length 474.3
  Top Layer w110: W.1 5265,2686.43 5321.42,2742.85 L2.2
NetL3_1: L3.1 U2.3 | length 185.8
  Top Layer w30: L3.1@5634.27,1676.01 U2.3
NetR6_2: R6.2 R9.1 TP12.1 | length 380.7
  Top Layer w30: R9.1@3703.47,4213.28 3775.53,4141.22 3775.53,4113.56 R6.2@4026.67,4113.56
NetR7_1: R7.1 R8.2 | length 98.3
  Top Layer w20: R8.2 3558.21,4133.45 3573.02,4118.64 R7.1
NetR8_1: R8.1 R9.2 | length 94.6
  Top Layer w40: R8.1 3531.51,4212.3 R9.2
NEUTRAL: C2.2 CN2.2 L1.1 VAR.1 | length 3056.4
  Top Layer w110: VAR.1 1693.46,2730.7 1693.46,3709.23 1824.92,3840.69 ; CN2.2 1824.92,3840.69 ; 1994.31,3840.69 1824.92,3840.69 ; 2013.18,3821.82 2249.1,3585.9 2965.67,3585.9 3048.62,3668.85 C2.2
VOUT: C9.1 C10.1 C11.1 C12.2 C13.2 CN3.1 D5.1 D6.1 R6.1 TP9.1 TP14.1 | length 4397
  Top Layer w20: TP14.1 TP14.1@4362.36,4114.32
  Top Layer w30: R6.1@4138.87,4113.56 TP14.1@4310.62,4113.56 ; TP14.1@4362.36,4114.32 4410.34,4066.34 4528.9,3947.78 5036.85,3947.78 5156.38,3828.26 5867.78,3828.26
  Top Layer w120: D5.1 5126.97,3665.21 5872.21,3665.21 ; CN3.1 5687.96,3959.47 TP9.1 5970.81,3953.25 6029.06,3895 6029.06,3879.74
  Top Layer w200: 5811.15,2070.11 5990.28,2249.24 C9.1
  Bottom Layer w120: C11.1 5985.28,3496.51 C13.2 ; C9.1 5990.28,2585.05 C12.2
pads on no net: CN1.4 CN1.7 CN1.8 CN1.9 HT1.1 HT1.2 HT1.3 L2.3 L2.4 U1.1 U1.8

## Polygon pours and split planes (outlines as drawn)
-12V_ISO on Bottom Layer "Bottom layer-GND-sub" (solid, remove dead copper, pour order 29): 4155.13,2864.39 4155.13,2569.31 4239.99,2569.16 4239.99,2187.14 4237.77,2184.91 3278.02,2184.91 3278.02,2379.72 3279.95,2381.64 3282.83,2378.76 3369.25,2378.76 3369.25,2785.57 3367.37,2783.69 3319.89,2783.69 3319.89,3078.49 3320.59,3079.2 4000.19,3079.13 4000.19,2866.93 3997.64,2864.39
-12V_ISO on Signal Layer 1 "Bottom layer-GND" (solid, remove dead copper, pour order 33): 4155.13,2864.39 4155.12,2569.89 4239.99,2569.74 4239.99,2277.38 3278.02,2277.38 3278.02,2379.72 3279.95,2381.64 3282.83,2378.76 3369.25,2378.76 3369.25,2785.57 3367.37,2783.69 3319.89,2783.69 3319.89,3078.49 3320.59,3079.2 4000.19,3079.13 4000.19,2866.93 3997.64,2864.39

## Other copper
Top Layer:
  rectangle net VOUT: 5201.57,1979.74 5853.16,2160.33
  rectangle net VOUT: 5853.16,2246.14 6090.45,3901.92
Signal Layer 1:
  pour cut-out: 2766.71,2173.29 4318.29,2173.29 4320,2175 4320,1785 2765,1785 2766.71,1786.71
  pour cut-out: 3400,3190.04 3235.04,3190.04 3235,3190 3235,2755 3400,2755
Bottom Layer:
  rectangle net -12V_ISO: 5157.43,3888.14 5353.46,4150.45
  rectangle net NetBR_4: 3176.31,2525.82 3236.1,2643.18
  rectangle net NetBR_4: 3051.81,2448.12 3236.1,2538.68
  rectangle net -12V_ISO: 2825,2165 3227.91,2285

## Silkscreen, mask and mechanical layers (free items; w line width, h text height)
Top Overlay:
  drawing of 1445 lines, arcs and shapes, not listed
  text "390Vdc" at 5501.33,4204.86 h70 r180
  text "+" at 5540.74,4156.57 h60
  text "-" at 5214.28,4154.94 h60
  text "E" at 1605.97,3790.8 h60
  text "N" at 1787.77,3789.15 h60
  text "L" at 1993.68,3783.38 h60
  text "-" at 6519.34,1763.37 h60 r270
  text "+" at 6224.74,1751.71 h40
  text "12V" at 6550.6,1630.79 h60 r90
  text "+" at 6549.86,1600.37 h60 r180
  text "US Medical Innovation" at 1873.45,1201.92 h60
  text "PG_02_PFC_002" at 1941.83,1158.96 h60
  text "-" at 7359.42,394.18 h40
Mechanical 10:
  the board outline again, w20

## Text inside footprints (layer, text, board x,y; h text height)
CN1: Top Overlay "1" at 3519.39,3218.88 h40 r270; Top Overlay "9" at 3523.39,3637.88 h40 r270
D6: Top Overlay "2" at 5090.05,2206.5 h40 r180; Top Overlay "1" at 5300.05,2206.5 h40 r180
D7: Top Overlay "2" at 4515.05,2206.5 h40 r180; Top Overlay "1" at 4725.05,2206.5 h40 r180